# Altium PCB Ad_Fpga.PcbDoc (part 8 of 8)
Units mil, origin at the board's own origin, x right, y up, seen from the top; angles counter-clockwise.
Board outline 5995 x 3921.26 mil, 6 copper layers (Top Layer, GND, Mid-Layer 1, Mid-Layer 2, VCC, Bottom Layer); 476 components, 538 nets, 2139 pads, 1047 vias.
Unrouted connection lines stored in the file: 2.
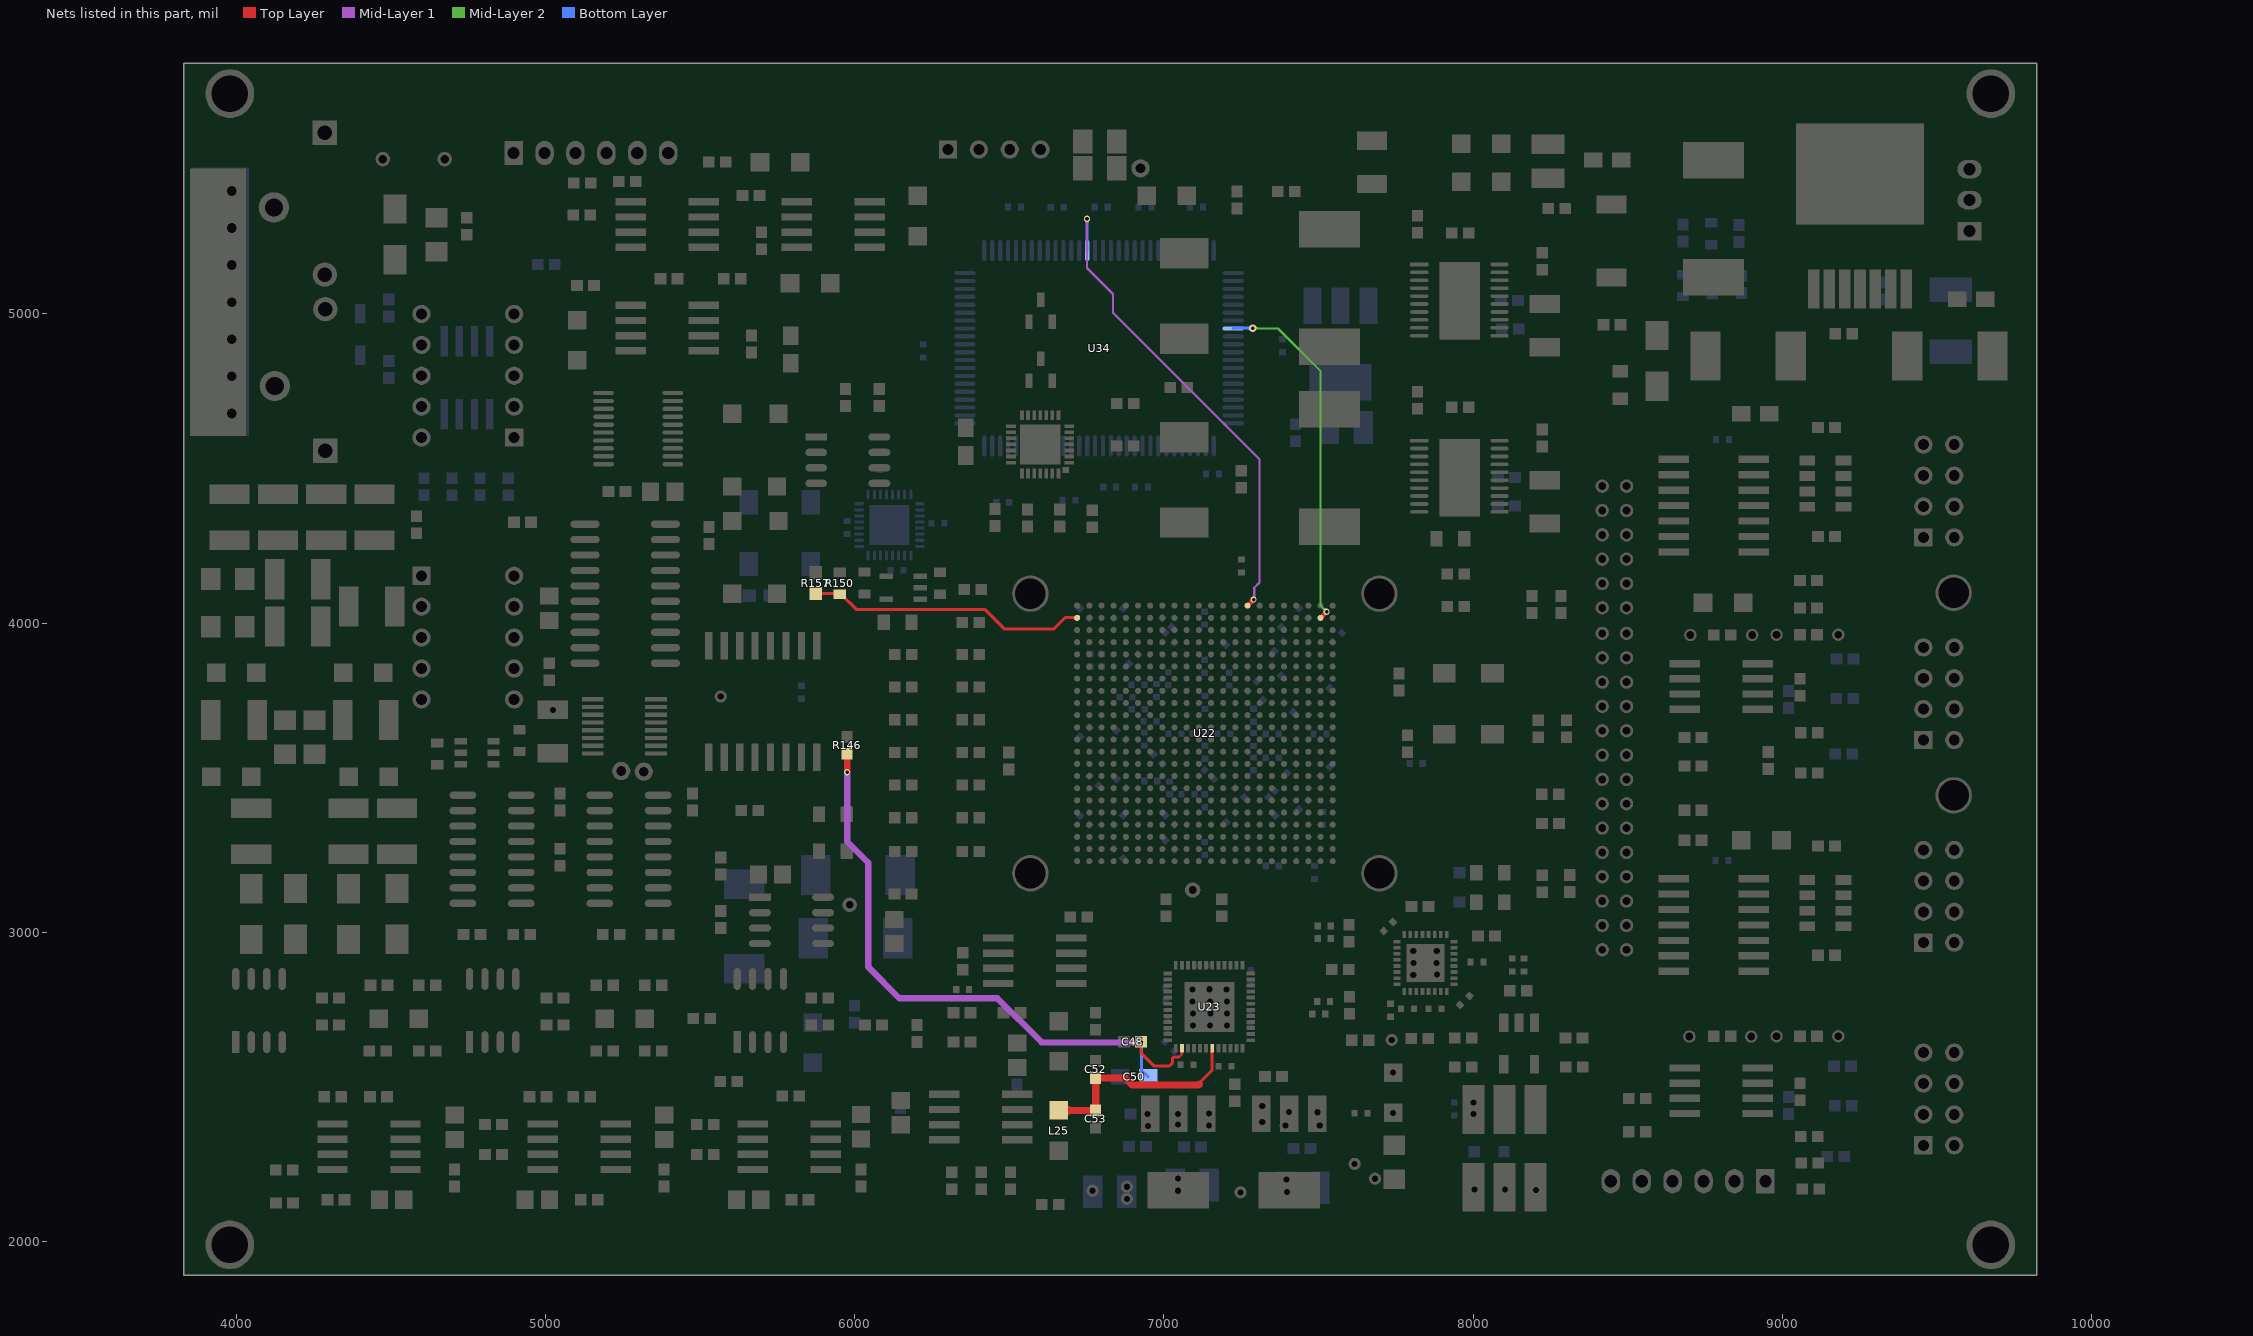
[diagram p12: the nets of this part, all layers, seen from the top]

## Via types
v1: diameter 19.68, hole 11.81, Top Layer to Bottom Layer, 523 vias
v2: diameter 50, hole 25, Top Layer to Bottom Layer, 162 vias
v3: diameter 30, hole 15, Top Layer to Bottom Layer, 100 vias
v4: diameter 39.37, hole 19.68, Top Layer to Bottom Layer, 75 vias
v5: diameter 31.5, hole 15.75, Top Layer to Bottom Layer, 44 vias
v6: diameter 40, hole 20, Top Layer to Bottom Layer, 38 vias
v7: diameter 24, hole 12, Top Layer to Bottom Layer, 33 vias
v8: diameter 47.24, hole 23.62, Top Layer to Bottom Layer, 24 vias
v9: diameter 59.06, hole 31.5, Top Layer to Bottom Layer, 10 vias
v10: diameter 60, hole 30, Top Layer to Bottom Layer, 9 vias
v11: diameter 25.98, hole 12.99, Top Layer to Bottom Layer, tented top, 9 vias
v12: diameter 23.62, hole 11.81, Top Layer to Bottom Layer, 8 vias
v13: diameter 50, hole 27.56, Top Layer to Bottom Layer, 4 vias
v14: diameter 51.18, hole 27.56, Top Layer to Bottom Layer, 2 vias
v15: diameter 39.37, hole 23.62, Top Layer to Bottom Layer, 2 vias
v16: diameter 80, hole 40, Top Layer to Bottom Layer, 1 vias
v17: diameter 47.24, hole 19.68, Top Layer to Bottom Layer, 1 vias
v18: diameter 47.24, hole 27.56, Top Layer to Bottom Layer, 1 vias
v19: diameter 22.05, hole 11.81, Top Layer to Bottom Layer, 1 vias

## Nets (pads, with @x,y where several pads share a name; then routed paths per layer and width w, separated by ;. In a path a pad name is that pad's centre, name@x,y a point inside that pad or via, vN(x,y) a via of type N, cw(c..) or ccw(c..) an arc to the next point about the centre after c; other vN are vias at no path point) (continued)
VIN-: C52.2 C53.2 L25.2 U23.31 | length 772.3
  Top Layer w10: 7114.7,2508 7114.7,2511.54 7155.06,2551.9 7155.06,2622.85 U23.31@7156.21,2624
  Top Layer w23.62: L25.2@6660,2423 C53.2@6779,2423 C52.2@6779,2528 6875,2528 6897.62,2505.38 7112.08,2505.38 7114.7,2508 ; L25.2@6672.86,2410.14 cw(c6703.91,2379.09) 6703.91,2423 cw(c6703.91,2466.91) L25.2@6672.86,2435.86
VREF: C48.1 C50.1 R146.2 U23.26 | length 2054.3
  Top Layer w7: 7048.69,2596 7049,2596 7057.81,2604.81 U23.26@7057.81,2624
  Top Layer w10: C48.1@6926,2645 6926,2608 6967,2567 7018,2567 7027,2576 7027,2591 7032.31,2596.31 7048.69,2596.31
  Top Layer w20: v1(5975,3517) R146.2@5975,3577
  Mid-Layer 1 w20: v1(5975,3517) 5975,3293 6043,3225 6043,2887 6144,2786 6461,2786 6604,2643 6926,2643 v1(6927,2644)
  Bottom Layer w10: v1(6927,2644) 6927,2554 C50.1@6949,2532
W#: U22.B2 U34.88 | length 1267.8
  Top Layer w15: U22.B2@7506.63,4016.63 v1(7526.32,4036.32)
  Mid-Layer 2 w7: v12(7287,4954) 7287,4953 7369,4953 7506.97,4815.03 7506.97,4055.66 v1(7526.32,4036.32) ; v12@7292.88,4948.12 cw(c7304.65,4936.35) 7304.65,4953 ; v12@7292.88,4959.88 ccw(c7309.48,4976.48) 7309.48,4953 ; 7515.49,4047.14 cw(c7504.66,4036.32) 7519.97,4036.32 ccw(c7504.66,4036.32) 7515.49,4047.14 ; 7515.49,4047.14 ccw(c7526.32,4057.97) 7526.32,4042.66 cw(c7526.32,4057.97) 7515.49,4047.14
  Bottom Layer w10: U34.88@7224.06,4952.98 7225.08,4954 v12(7287,4954) ; U34.88@7252.95,4951.64 cw(c7258.65,4945.94) 7258.65,4954 ; v12@7282.18,4949.18 ccw(c7270.56,4937.56) 7270.56,4954 ccw(c7270.56,4970.44) v12@7282.18,4958.82
WDI: R150.1 R157.2 U22.AB2 | length 909.4
  Top Layer w10: R157.2@5873,4095.5 5952.5,4095.5 6004,4044 6420,4044 6483,3981 6644.23,3981 6681.01,4017.79 6718.07,4017.79 U22.AB2@6719.23,4016.63
ZZ: U22.H1 U34.64 | length 1690.3
  Top Layer w15: U22.H1@7270.41,4056 v1(7290.1,4075.69)
  Mid-Layer 1 w7: v1@6746.52,5303.52 cw(c6735.69,5292.69) 6751,5292.69 cw(c6766.31,5292.69) v1@6755.48,5303.52 ; v1(6751,5308) 6751,5148.64 6835,5064.64 6835,5003.77 7309,4529.77 7309,4131.23 7292,4114.23 v1@7292,4077.59 ; v1@7285.61,4080.17 ccw(c7270.19,4095.59) 7292,4095.59 cw(c7270.19,4095.59) v1@7285.61,4080.17 ; 7292,4086.4 ccw(c7300.81,4086.4) 7294.58,4080.17 cw(c7300.81,4086.4) 7292,4086.4
  Bottom Layer w10: v1@6747.58,5304.58 cw(c6737.83,5294.83) 6751.61,5294.83 ; v1(6751,5308) 6751.61,5307.39 U34.64@6751.61,5204.94 ; 6751.61,5297.79 cw(c6761.21,5297.79) v1@6754.42,5304.58
pads on no net: D19.5 D19.6 D19.7 D19.8 D20.17 D20.18 D20.19 D20.22 D20.23 D20.24 D20.28 D20.29 D20.30 D20.31 D20.32 N1.7 N3.5 RN1.2 RN2.2 SW1.0 SW2.0 T1.2 U2.1 U2.5 U3.3 U3.4 U3.9 U7.1 U7.5 U8.14 U12.1 U12.5 U12.8 U13.1 U13.3 U13.7 U13.8 U14.3 U14.4 U14.5 U14.6 U14.11 U14.12 U14.13 U14.14 U16.1 U16.5 U20.7 U21.1 U21.2 U21.10 U21.11 U21.12 U21.13 U21.14 U21.15 U21.16 U21.17 U21.18 U21.19 U21.20 U21.21 U21.22 U21.23 U21.24 U21.27 U21.28 U22.A7 U22.A15 U22.AA12 U22.AB12 U22.B20 U22.C7 U22.C19 U22.D17 U22.F16 U22.G16 U22.G17 U22.J17 U22.K19 U22.K20 U22.K22 U22.P21 U22.R20 U22.T21 U22.U20 U22.U22 U23.36 U23.43 U24.6 U24.27 U24.28 U25.3 U25.4 U25.20 U26.3 U26.4 U26.20 U31.1 U31.5 U32.1 U32.5 U33.1 U33.5 U34.1 U34.2 U34.3 U34.6 U34.7 U34.16 U34.25 U34.28 U34.29 U34.30 U34.38 U34.39 U34.42 U34.43 U34.51 U34.52 U34.53 U34.56 U34.57 U34.66 U34.75 U34.78 U34.79 U34.84 U34.95 U34.96 U36.4 U36.5 U38.1 X1.1
copper on no net: | length 753.1
  Top Layer w15: 5152,3653 5245,3653 5246,3652 v1(5244,3652) ; 5152,3678 5152.34,3677.66 5222.67,3677.66 5223.01,3678 v1(5245,3678)
  Top Layer w31.5: v4(6218,2111) 6218,2168
  Mid-Layer 1 w15: 5244,3521 v1(5244,3652) ; v1(5245,3678) 5296,3678 5317,3657 5317,3519
  Bottom Layer w10: 6013.57,4326.84 6054.91,4326.84 v11(6064.76,4317) ; 6062.79,4415.43 6062.79,4366.21 v11(6064.76,4364.24) ; 6141.53,4218.57 6141.53,4264.53 6144,4267
  other v1: 7486.95,3839.47
  other v2: 9737,4388 9734,4506
  other v11: 6064.76,4269.76 6112,4269.76 6159.24,4269.76 6112,4317 6159.24,4317 6112,4364.24 6159.24,4364.24

## Polygon pours and split planes (outlines as drawn)
GND on GND (split plane): 193 vertices, not listed, extent 4530.56,1909.86 9803.9,5790.93
AGND on GND (split plane): 203 vertices, not listed, extent 3849.1,1909.86 7825.44,5790.93
VCC3V3 on VCC (split plane): 238 vertices, not listed, extent 4639,1909.86 9803.9,5609.44
AVCC5V on VCC (split plane): 7997.44,5385.56 7740.13,5385.56 7620.35,5505.35 7618.78,5506.55 7618.03,5506.86 7616.96,5507.31 7615,5507.56 7419.13,5507.56 7304.35,5622.35 7302.78,5623.55 7302.03,5623.86 7300.96,5624.31 7299,5624.56 6228,5624.56 6226.04,5624.31 6224.22,5623.55 6222.65,5622.35 6022.65,5422.35 5843.65,5243.35 5842.45,5241.78 5842.14,5241.03 5841.69,5239.96 5841.44,5238 5841.44,4945.13 5639.65,4743.35 5638.45,4741.78 5638.14,4741.03 5637.69,4739.96 5637.44,4738 5637.44,4343.56 5411.13,4343.56 5110.56,4644.13 5110.56,5031 5110.56,5349 5110.31,5350.96 5109.55,5352.78 5108.35,5354.35 5106.78,5355.55 5104.96,5356.31 5103,5356.56 4395,5356.56 4393.04,5356.31 4391.22,5355.55 4389.65,5354.35 4388.45,5352.78 4387.69,5350.96 4387.44,5349 4387.44,3661 4387.69,3659.04 4388.45,3657.22 4389.65,3655.65 4391.22,3654.45 4393.04,3653.69 4395,3653.44 5115.87,3653.44 5155.44,3613.87 5155.44,3400.13 5049.87,3294.56 4438,3294.56 4436.04,3294.31 4434.22,3293.55 4432.65,3292.35 4431.45,3290.78 4430.69,3288.96 4430.44,3287 4430.44,2623 4430.69,2621.04 4431.45,2619.22 4432.65,2617.65 4434.22,2616.45 4436.04,2615.69 4438,2615.44 6246.44,2615.44 6246.44,2521 6246.44,2398 6246.44,2348.56 4424,2348.56 4422.04,2348.31 4420.22,2347.55 4418.65,2346.35 4417.45,2344.78 4417.14,2344.03 4416.69,2342.96 4416.44,2341 4416.44,2090 4416.69,2088.04 4417.45,2086.22 4418.65,2084.65 4420.22,2083.45 4422.04,2082.69 4424,2082.44 6604,2082.44 6605.96,2082.69 6607.78,2083.45 6609.35,2084.65 6610.55,2086.22 6611.31,2088.04 6611.56,2090 6611.31,2091.96 6610.56,2093.75 6610.56,2201.44 7531.44,2201.44 7531.44,2090 7531.69,2088.04 7532.44,2086.25 7532.44,1909.86 4086,1909.86 4086,2070 3849.1,2070 3849.1,5630.79 4086,5630.79 4086,5790.93 7997.44,5790.93
A-5V on VCC (split plane): 5095.44,5031 5095.44,4648.56 4677,4648.56 4675.04,4648.31 4673.22,4647.55 4671.65,4646.35 4670.45,4644.78 4669.69,4642.96 4669.44,4641 4669.44,4090 4669.69,4088.04 4670.45,4086.22 4671.65,4084.65 4673.22,4083.45 4675.04,4082.69 4677,4082.44 5302.87,4082.44 5518.44,3866.87 5518.44,3336.13 5263.87,3081.56 4631.44,3081.56 4629.48,3081.31 4627.65,3080.55 4626.09,3079.35 4624.88,3077.78 4624.13,3075.96 4623.87,3074 4623.87,2898.44 4623.87,2875 4624.13,2873.04 4624.88,2871.22 4626.09,2869.65 4627.65,2868.45 4629.48,2867.69 4631.44,2867.44 5707,2867.44 5708.96,2867.69 5710.78,2868.45 5712.35,2869.65 5713.55,2871.22 5714.31,2873.04 5714.56,2875 5714.56,3260.17 5746.83,3292.44 5997.87,3292.44 6269.44,3020.87 6269.44,2973 6269.44,2855 6269.44,2839 6269.44,2761 6269.69,2759.04 6270.45,2757.22 6271.65,2755.65 6273.22,2754.45 6275.04,2753.69 6277,2753.44 6463,2753.44 6464.96,2753.69 6466.78,2754.45 6467.56,2755.04 6596.11,2755.04 6596.45,2754.22 6597.04,2753.44 6597.04,2625.56 6596.45,2624.78 6595.69,2622.96 6595.44,2621 6595.44,2097.56 4431.56,2097.56 4431.56,2333.44 6255,2333.44 6256.73,2333.66 6256.96,2333.69 6258.78,2334.45 6260.35,2335.65 6261.55,2337.22 6262.31,2339.04 6262.34,2339.27 6262.56,2341 6262.34,2342.73 6262.31,2342.96 6261.56,2344.75 6261.56,2622 6261.34,2623.73 6261.31,2623.96 6260.55,2625.78 6259.35,2627.35 6258.35,2628.35 6256.78,2629.55 6256.03,2629.86 6254.96,2630.31 6253,2630.56 4445.56,2630.56 4445.56,3279.44 5053,3279.44 5054.96,3279.69 5056.03,3280.14 5056.78,3280.45 5058.35,3281.65 5168.35,3391.65 5169.55,3393.22 5170.31,3395.04 5170.56,3397 5170.56,3617 5170.31,3618.96 5169.86,3620.03 5169.55,3620.78 5168.35,3622.35 5124.35,3666.35 5122.78,3667.55 5122.03,3667.86 5120.96,3668.31 5119,3668.56 4402.56,3668.56 4402.56,5341.44 5095.44,5341.44
VCC5V on VCC (split plane): 8989.44,5002 8989.69,5000.04 8990.14,4998.97 8990.45,4998.22 8991.65,4996.65 9030.65,4957.65 9032.22,4956.45 9034.04,4955.69 9036,4955.44 9282.44,4955.44 9282.44,2573 9282.44,2509 9282.44,2304 9282.44,2292 9282.44,2157.13 9259.87,2134.56 9037.13,2134.56 9012.56,2159.13 9012.56,2352.87 9044.35,2384.65 9045.55,2386.22 9046.31,2388.04 9046.56,2390 9046.56,2414 9046.56,3343 9046.31,3344.96 9045.86,3346.03 9045.55,3346.78 9044.35,3348.35 8872.56,3520.13 8872.56,3709.44 9052,3709.44 9053.96,3709.69 9055.78,3710.45 9057.35,3711.65 9058.55,3713.22 9059.31,3715.04 9059.56,3717 9059.56,4734 9059.31,4735.96 9058.55,4737.78 9057.35,4739.35 9055.35,4741.35 9053.78,4742.55 9053.03,4742.86 9051.96,4743.31 9050,4743.56 8419,4743.56 8417.04,4743.31 8415.22,4742.55 8413.65,4741.35 8412.45,4739.78 8411.69,4737.96 8411.44,4736 8411.44,4373.56 8111.56,4373.56 8111.56,5248 8111.31,5249.96 8110.86,5251.03 8110.55,5251.78 8109.35,5253.35 8024.56,5338.13 8024.56,5790.93 8989.44,5790.93
BATT12V on VCC (split plane): 9567,5630 9789.91,5630 9789.91,4746.09 9313.09,4746.09 9313.09,4973 9312.74,4975.61 9311.74,4978.04 9310.13,4980.13 9308.13,4982.13 9306.04,4983.73 9303.61,4984.74 9301,4985.09 9046.18,4985.09 9022.09,5009.18 9022.09,5075 9022.09,5790.93 9567,5790.93
VDDQ on VCC (split plane): 7107.44,5463.87 7107.44,5219.56 6815.56,5219.56 6815.56,5433 6815.31,5434.96 6814.55,5436.78 6813.35,5438.35 6811.78,5439.55 6809.96,5440.31 6808,5440.56 6678,5440.56 6676.04,5440.31 6674.22,5439.55 6672.65,5438.35 6671.45,5436.78 6670.69,5434.96 6670.44,5433 6670.44,5357 6670.69,5355.04 6671.14,5353.97 6671.45,5353.22 6672.65,5351.65 6704.44,5319.87 6704.44,4992.13 6673.87,4961.56 6380,4961.56 6378.04,4961.31 6376.22,4960.55 6374.65,4959.35 6373.45,4957.78 6372.69,4955.96 6372.44,4954 6372.44,4854 6372.69,4852.04 6373.45,4850.22 6374.65,4848.65 6376.22,4847.45 6378.04,4846.69 6380,4846.44 6656.87,4846.44 6759.44,4743.87 6759.44,4478 6759.69,4476.04 6760.45,4474.22 6761.65,4472.65 6763.22,4471.45 6765.04,4470.69 6767,4470.44 6838,4470.44 6839.96,4470.69 6841.78,4471.45 6843.35,4472.65 6844.55,4474.22 6845.31,4476.04 6845.56,4478 6845.56,4734.87 6881.13,4770.44 7177.44,4770.44 7177.44,4597.56 7056,4597.56 7054.04,4597.31 7052.97,4596.86 7052.22,4596.55 7050.65,4595.35 6965.65,4510.35 6964.45,4508.78 6964.14,4508.03 6963.69,4506.96 6963.44,4505 6963.44,4390.56 6311.13,4390.56 6152.56,4549.13 6152.56,5280.44 6374,5280.44 6375.96,5280.69 6377.03,5281.14 6377.78,5281.45 6379.35,5282.65 6602.13,5505.44 7065.87,5505.44
DUTAVDD on VCC (split plane): 7213.44,2762 7213.69,2760.04 7214.45,2758.22 7215.65,2756.65 7217.22,2755.45 7219.04,2754.69 7221,2754.44 7310.44,2754.44 7310.44,2668 7310.69,2666.04 7311.45,2664.22 7312.65,2662.65 7314.22,2661.45 7316.04,2660.69 7318,2660.44 7531.44,2660.44 7531.44,2216.56 6610.56,2216.56 6610.56,2621 6610.31,2622.96 6609.55,2624.78 6608.96,2625.56 6608.96,2750.44 7072,2750.44 7073.96,2750.69 7075.78,2751.45 7077.35,2752.65 7078.55,2754.22 7079.31,2756.04 7079.56,2758 7079.56,2825.44 7213.44,2825.44
VCC1V2 on VCC (split plane): 7948.44,4686.13 7640.87,4378.56 7417,4378.56 7415.04,4378.31 7413.22,4377.55 7411.65,4376.35 7144.65,4109.35 7143.45,4107.78 7143.14,4107.03 7142.69,4105.96 7142.44,4104 7142.44,3781 7142.69,3779.04 7143.45,3777.22 7144.65,3775.65 7146.22,3774.45 7148.04,3773.69 7150,3773.44 7202,3773.44 7203.96,3773.69 7205.78,3774.45 7207.35,3775.65 7208.55,3777.22 7209.31,3779.04 7209.56,3781 7209.56,3807.87 7223.13,3821.44 7261.44,3821.44 7261.44,3749 7261.69,3747.04 7262.14,3745.97 7262.45,3745.22 7263.65,3743.65 7283.44,3723.87 7283.44,3524.13 7269.87,3510.56 6960.26,3510.56 6957.13,3513.7 6957.13,3543.43 7000.35,3586.65 7001.55,3588.22 7002.31,3590.04 7002.56,3592 7002.56,3773.44 7070.25,3773.44 7072.04,3772.69 7072.27,3772.66 7074,3772.44 7075.73,3772.66 7075.96,3772.69 7077.78,3773.45 7079.35,3774.65 7080.55,3776.22 7081.31,3778.04 7081.34,3778.27 7081.56,3780 7081.56,4018 7081.31,4019.96 7080.86,4021.03 7080.55,4021.78 7079.35,4023.35 6978.56,4124.13 6978.56,4501.87 7059.13,4582.44 7187,4582.44 7461,4582.44 7462.96,4582.69 7464.03,4583.14 7464.78,4583.45 7466.35,4584.65 7694.13,4812.44 7948.44,4812.44
DUTDRVDD on VCC (split plane): 7402.44,2779 7402.69,2777.04 7403.45,2775.22 7404.65,2773.65 7406.22,2772.45 7408.04,2771.69 7410,2771.44 7643.44,2771.44 7643.44,2610 7643.69,2608.04 7644.14,2606.97 7644.44,2606.25 7644.44,2497 7644.69,2495.04 7645.45,2493.22 7646.65,2491.65 7648.22,2490.45 7650.04,2489.69 7652,2489.44 7811.44,2489.44 7811.44,1909.86 7547.56,1909.86 7547.56,2090 7547.31,2091.96 7546.56,2093.75 7546.56,2208 7546.56,2668 7546.31,2669.96 7545.55,2671.78 7544.35,2673.35 7542.78,2674.55 7540.96,2675.31 7539,2675.56 7325.56,2675.56 7325.56,2762 7325.31,2763.96 7324.55,2765.78 7323.35,2767.35 7321.78,2768.55 7319.96,2769.31 7318,2769.56 7228.56,2769.56 7228.56,2833 7228.31,2834.96 7227.55,2836.78 7226.35,2838.35 7224.78,2839.55 7222.96,2840.31 7221,2840.56 7072,2840.56 7070.04,2840.31 7068.22,2839.55 7066.65,2838.35 7065.45,2836.78 7064.69,2834.96 7064.44,2833 7064.44,2765.56 6889.56,2765.56 6889.56,3008.44 7402.44,3008.44
VDD on VCC (split plane): 6800.44,5212 6800.44,4982 6800.69,4980.04 6801.14,4978.97 6801.45,4978.22 6802.65,4976.65 6905.65,4873.65 6907.22,4872.45 6907.97,4872.14 6909.04,4871.69 6911,4871.44 7177.44,4871.44 7177.44,4785.56 6878,4785.56 6876.04,4785.31 6874.22,4784.55 6872.65,4783.35 6832.65,4743.35 6831.45,4741.78 6831.14,4741.03 6830.69,4739.96 6830.44,4738 6830.44,4485.56 6774.56,4485.56 6774.56,4747 6774.31,4748.96 6773.55,4750.78 6772.35,4752.35 6665.35,4859.35 6663.78,4860.55 6663.03,4860.86 6661.96,4861.31 6660,4861.56 6387.56,4861.56 6387.56,4946.44 6677,4946.44 6678.96,4946.69 6680.03,4947.14 6680.78,4947.45 6682.35,4948.65 6717.35,4983.65 6718.55,4985.22 6719.31,4987.04 6719.56,4989 6719.56,5323 6719.31,5324.96 6718.55,5326.78 6717.35,5328.35 6685.56,5360.13 6685.56,5425.44 6800.44,5425.44

## Keep-outs
Keep-Out Layer:
  the board outline again, w3.94

## Other copper
Top Layer:
  rectangle net VCC5V: 8061,4436 8189,4489
  rectangle net VCC5V: 8063,5010 8184,5058
  rectangle net GND: 8014,4345 8109,4415
  rectangle net NetC71_1: 7802,4357 7852,4467
  rectangle net GND: 8012,4917 8110,4984
  rectangle net NetC70_1: 7799,4928 7853,5033
  rectangle net NetC103_1: 8864,5069 9091,5139
VCC (plane layer: these items are gaps in the copper):
  rectangle: 3827,5630.79 4086,5825.79
  rectangle: 3827,1875 4086,2070
  region: 9826,5825 9567,5825 9567,5630 9826,5630
  region: 9826,2070 9567,2070 9567,1875 9826,1875
  lines w11.81: 6426,2761 6600,2761 6603,2758 6603,2611
  lines w15: 6173,2341 6255,2341 6254,2342 6254,2622 6253,2623 6152,2623 5371,2623 4438,2623 4438,3287 5053,3287 5163,3397 5163,3617 5119,3661 4395,3661 4395,5349 5103,5349 5103,5031 5103,4641 ; 6197,2341 4424,2341 ; 6254,2398 6254,2521 ; 6277,2839 6277,2973 6277,3024 6001,3300 5743.7,3300 5707,3263.3 5707,2875 4631.44,2875 4631.44,2898.44 4631.44,3074 5267,3074 5526,3333 5526,3870 5306,4090 4677,4090 ; 6277,2855 6277,2761 6377,2761 ; 6355,2761 6463,2761 ; 6603,2209 7538,2209 7539,2208 ; 6603,2621 6603,2090 4424,2090 ; 6603,2758 6855,2758 7072,2758 7072,2833 7221,2833 7221,2762 7318,2762 7318,2668 7539,2668 7539,2090 ; 6604,2090 4424,2090 ; 6882,2758 6882,3016 7411,3016 7410,3015 7410,2779 7651,2779 7651,2610 7652,2609 7652,2497 7819,2497 7819,1896.76 7826,1889.76 ; 7540,2090 7540,1890.76 7541,1889.76 ; 7790,1892 3828,1892 3828,5813 8005,5813 8005,5378 7737,5378 7615,5500 7416,5500 7299,5617 6228,5617 6028,5417 5849,5238 5849,4942 5645,4738 5645,4336 5408,4336 5103,4641 ; 7819,1890.76 7820,1889.76 ; 9039,2414 9039,2390 ; 9290,2292 9290,2509 9290,2573 9290,4963 9036,4963 8997,5002 8997,5815 8017,5815 8017,5335 8104,5248 8104,4366 8419,4366 8419,4736 9050,4736 9052,4734 9052,3717 8865,3717 8865,3517 9039,3343 9039,2390 ; 9290,2304 9290,2154 9263,2127 9034,2127 9005,2156 9005,2356 9039,2390 ; 4424,2090 4424,2341 ; 4424,2341 4424,2341 ; 4677,4090 4677,4641 ; 4677,4090 4677,4641 ; 4677,4641 5103,4641 ; 6380,4854 6380,4954 ; 6380,4854 6660,4854 ; 6380,4854 6660,4854 ; 6380,4854 6380,4954 ; 6380,4954 6677,4954 ; 6380,4954 6677,4954 ; 6660,4854 6767,4747 ; 6660,4854 6767,4747 ; 6677,4954 6712,4989 ; 6677,4954 6712,4989 ; 6678,5357 6678,5433 ; 6678,5357 6712,5323 ; 6678,5357 6712,5323 ; 6678,5357 6678,5433 ; 6678,5433 6808,5433 ; 6678,5433 6712,5433 6776,5433 6808,5433 ; 6712,4989 6712,5323 ; 6712,4989 6712,5323 ; 6767,4478 6767,4747 ; 6767,4478 6838,4478 ; 6767,4478 6838,4478 ; 6767,4478 6767,4747 ; 6808,5433 6808,5212 7115,5212 7115,5467 7069,5513 6599,5513 6374,5288 6145,5288 6145,4546 6308,4383 6931,4383 6971,4383 6971,4505 ; 6808,5433 6808,4982 6911,4879 7185,4879 7185,4778 ; 6838,4478 6838,4738 ; 6838,4478 6838,4738 ; 6838,4738 6878,4778 ; 6838,4738 6878,4778 ; 6878,4778 7185,4778 ; 6878,4778 7152,4778 7185,4778 ; 6971,4505 7056,4590 ; 6971,4505 6971,4121 7074,4018 7074,3780 7073,3781 6995,3781 6995,3592 6949.56,3546.56 6949.56,3510.56 6957.13,3503 7273,3503 7291,3521 7291,3727 7269,3749 7269,3829 7220,3829 7202,3811 7202,3781 7150,3781 7150,4104 7417,4371 7644,4371 7956,4683 7956,4820 7691,4820 7461,4590 7056,4590 ; 6971,4505 7056,4590 ; 7056,4590 7187,4590 7185,4592 7185,4778
  lines w20: 9012,5005 9012,5075 9012,5815 9800,5815 9800,4736 9303,4736 9303,4973 9301,4975 9047,4975 9042,4975 9012,5005
GND (plane layer: these items are gaps in the copper):
  rectangle: 3829,1905.59 4088,2100.59
  rectangle: 3829,5600.2 4088,5795.2
  region: 9824,5825 9565,5825 9565,5630 9824,5630
  region: 9824,2070 9565,2070 9565,1875 9824,1875
  lines w15: 4951,3740 4951,4212 ; 7221,2761 7221,2832 7071,2832 7071,2760 6284,2760 6284,3265 5716,3265 5654,3327 5221,3327 5221,3048 5484,3048 5485,3047 5485,2889 5367,2889 4982,2889 4982,3051 5022,3091 5022,3293 4849,3293 4849,3503 4850,3502 4593,3502 4592,3503 4592,3689 4949,3689 4951,3691 4951,4212 ; 7222,2762 7318,2762 7318,2668 7539,2668 7539,1891.76 7541,1889.76 ; 8084,1894 3827,1894 3827,5813 7833,5813 7833,5380 7457,5380 7411,5426 6793,5426 6793,5591 6757,5591 6173,5591 6172,5592 6172,5218 6013,5059 6013,4714 5737,4714 5669,4782 5247,4782 5111,4646 4875,4646 4681,4840 4523,4840 4523,4356 4667,4212 4951,4212

## Silkscreen, mask and mechanical layers (free items; w line width, h text height)
Top Overlay:
  circle w10: c7091.9,3135 r35
  text "SD171-6.0PCB4" at 4445,5621 h50
  text "AGND" at 6907,5601 h31.5
  text "U5V" at 6249,5600 h31.5
  text "UD+" at 6469,5599 h31.5
  text "UD-" at 6367,5598 h31.5
  text "VCC5V" at 8641,5594 h31.5
  text "+" at 8299,5532 h31.5
  text "A5V" at 7838,5489 h31.5 r90
  text "3.3V" at 7482,5351 h31.5
  text "+" at 9473,5277 h31.5
  text "1" at 7809,5175 h31.5
  text "1.2V" at 7472,4762 h31.5
  text "1" at 7810,4607 h31.5
  text "." at 6727,4514 h31.5
  text "1" at 6741,4503 h31.5
  text "39" at 8393,4470 h31.5
  text "+" at 4008,4032 h31.5
  text "+" at 4139,3723 h31.5
  text "+" at 4234,3723 h31.5
  text "1" at 5201,3612 h31.5 r90
  text "2.5V" at 5399,3521 h31.5
  text "DCO" at 7057,3057 h31.5
  text "1" at 5423,3056 h31.5 r90
  text "1" at 4985,3055 h31.5 r90
  text "1" at 8416,2876 h31.5
  text "1.8V" at 7354,2056 h31.5
  text "A3.3V" at 6975,2050 h31.5
Bottom Overlay:
  text "PV" at 4156,5225 h31.5
  text "PD" at 4151,4648 h31.5
  text "TX" at 9671,4382 h31.5 r90
  text "RX" at 9676,3722 h31.5 r90
  text "TX" at 9677,3065 h31.5 r90
  text "RX" at 9683,2414 h31.5 r90
  text "A5V" at 6925,2056 h31.5
  text "R124 To R131 Fited For HFBR-2412" at 9509,2011 h31.5